# EAGLE board caldi (EAGLE 6.4)
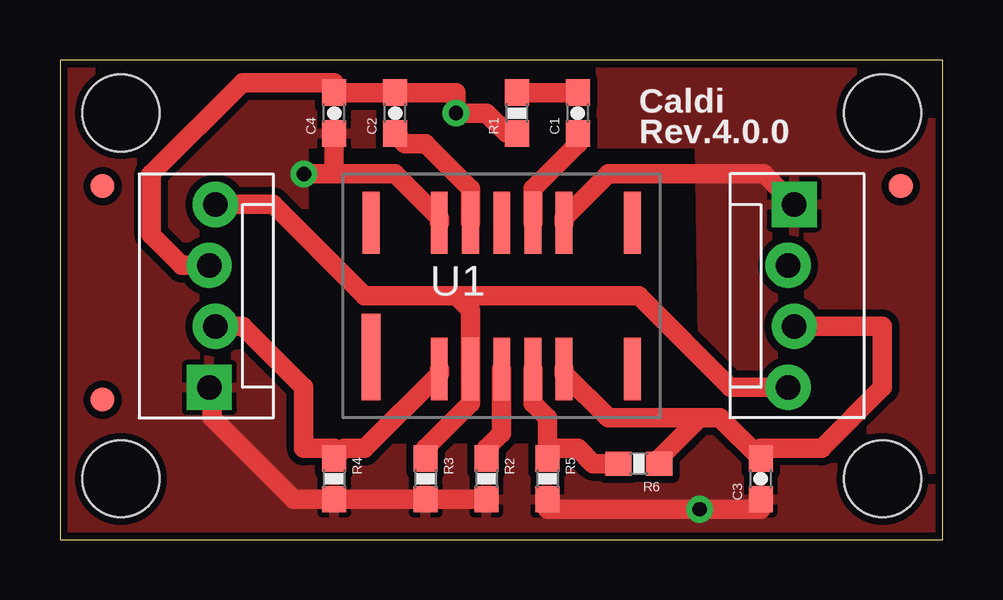
[diagram p0: board, top side]
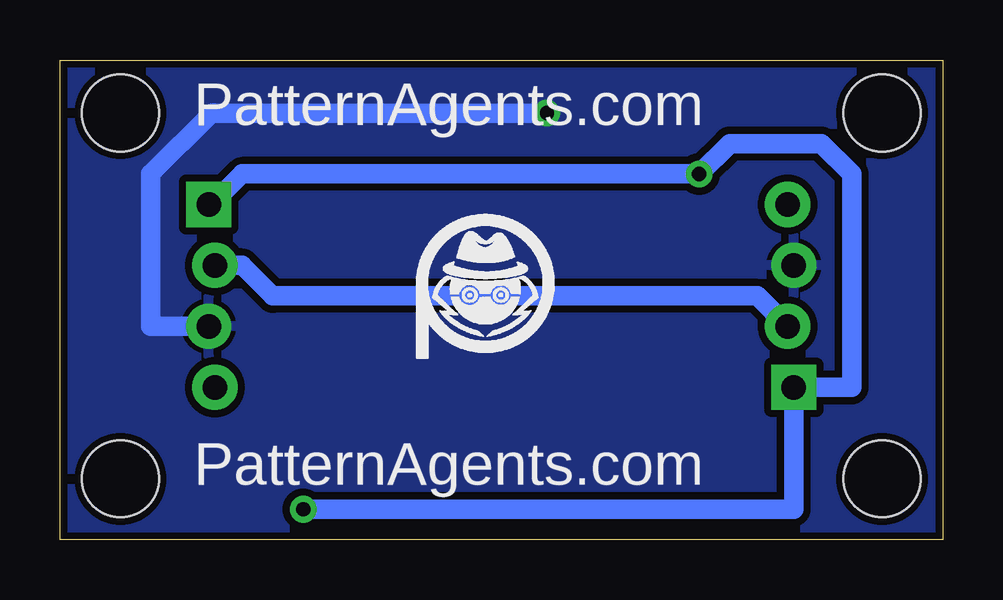
[diagram p1: board, bottom side, seen from below]

Size 36.81 x 19.99 mm. Coordinates in mm from the lower left corner, seen from the top.
Outline: 0,0 36.81,0 36.81,19.99 0,19.99 0,0
Copper layers (1*16): Top 0.035mm / dielectric 1.5mm / Bottom 0.035mm
Design rules "PatternAgents": minimum track width 8mil, minimum drill 14mil, track to track 8mil, track to pad 8mil, pad to pad 8mil, via to via 8mil, smd to smd 8mil, copper to edge 10mil, drill to drill 8mil, minimum pad ring 12mil, minimum via ring 10mil, stop-mask expansion 4mil, vias tented up to drill 25mil, thermal gap 8mil
Holes 3.2 mm at 2.54,2.54 2.54,17.78 34.29,17.78 34.29,2.54

## Footprints (pad centres in the part's own frame; a part is rotated, then mirrored left to right if it is on the bottom)
0603-CAP = smd 1.1 x 1: 1 -0.85,0; 2 0.85,0
MOLEX-1X4_LOCK = drill 1.016 pad 1.88 square: 1 0,0.127 | drill 1.016 pad 1.88: 2 2.54,-0.127; 3 5.08,0.127; 4 7.62,-0.127
FIDUCIAL-1X2 = smd 1 x 1: 1 0,0
0603-RES = smd 1.1 x 1: 1 -0.85,0; 2 0.85,0
AMG885X = smd 0.8 x 3.6: 1 -5.45,-2.55 | smd 0.7 x 2.6: 2 -2.6,-3.05; 3 -1.3,-3.05; 4 0,-3.05; 5 1.3,-3.05; 6 2.6,-3.05; 7 5.45,-3.05; 8 5.45,3.05; 9 2.6,3.05; 10 1.3,3.05; 11 0,3.05; 12 -1.3,3.05; 13 -2.6,3.05; 14 -5.45,3.05

## Placement (x,y rotation side)
C1  1uF  [0603-CAP]  21.59,17.78 90 top
C2  1.5uF  [0603-CAP]  13.97,17.78 90 top
C3  10uF  [0603-CAP]  29.21,2.54 90 top
C4  10uF  [0603-CAP]  11.43,17.78 90 top
JP1  [MOLEX-1X4_LOCK]  6.35,6.35 90 top
JP2  [MOLEX-1X4_LOCK]  30.48,13.97 270 top
JP3  FIDUCIAL1X2  [FIDUCIAL-1X2]  1.78,14.73 0 top
JP4  FIDUCIAL1X2  [FIDUCIAL-1X2]  1.78,5.84 0 top
JP5  FIDUCIAL1X2  [FIDUCIAL-1X2]  35.05,14.73 0 top
R1  20  [0603-RES]  19.05,17.78 90 top
R2  10K  [0603-RES]  17.78,2.54 270 top
R3  10K  [0603-RES]  15.24,2.54 270 top
R4  10K  [0603-RES]  11.43,2.54 270 top
R5  10K  [0603-RES]  20.32,2.54 270 top
R6  0  [0603-RES]  24.13,3.17 180 top
U1  AMG885X  [AMG885X]  18.41,10.16 0 top
U$4  PA_LOGO_SYMMED  [PA_LOGO_AGENT_MED_SYM]  19.05,10.16 0 bottom

## Library data of the parts
C1-C4 R1-R6 U1 = moxdes_V1_0
JP1 JP2 = SparkFun
JP3-JP5 = PatternAgents-Misc
U$4 = PatternAgents-Logos

## Nets
5V: C3.1 C4.1 JP1.1 JP2.1 R2.2 R3.2 R4.2 R5.2 U1.9 U1.13
!INT!: R2.1 U1.4
ADSEL: R5.1 R6.2 U1.5
GND: C2.2 C3.2 C4.2 JP1.3 JP2.3 R1.1 R6.1 U1.6
N$7: C1.1 U1.10
N$8: C1.2 R1.2
N$11: C2.1 U1.12
SCL: JP1.4 JP2.4 R3.1 U1.3
SDA: JP1.2 JP2.2 R4.1 U1.2

## Tracks (layer width: path | path; a pad name or v marks a point on that pad's centre or on a via)
5V  (via drill 0.6)
  Top 0.813: R2.2 R3.2 R4.2 9.74,1.69 6.35,5.08 6.35,6.22 JP1.1 | U1.13 15.81,13.39 13.97,15.24 11.43,15.24 | 11.43,15.24 C4.1 | v10.16,15.24 11.43,15.24 | U1.9 21.02,13.39 22.86,15.24 29.34,15.24 JP2.1 | C3.1 29.21,1.27 v26.67,1.27 20.32,1.27 R5.2
  Bottom 0.813: JP2.1 30.48,13.97 29.21,15.24 v10.16,15.24 8.89,16.51 5.08,16.51 3.81,15.24 3.81,6.35 JP1.1 6.22,1.27 v26.67,1.27
  pour Top (isolate 0.305, hatched): 0,20.32 36.83,20.32 36.83,0 26.92,0 26.67,16.51 10.16,16.51 10.16,3.81 26.42,3.81 26.42,0 0,0
  pour Top (isolate 0.305, hatched): 25.4,3.81 27.94,3.81 27.94,0 25.4,0
!INT!
  Top 0.813: U1.4 18.41,4.45 17.78,3.81 R2.1
ADSEL
  Top 0.813: U1.5 19.71,5.68 20.32,5.08 R5.1 20.74,3.81 21.59,3.81 22.23,3.17 R6.2
GND  (via drill 0.6)
  Top 0.813: JP1.3 5.08,11.43 3.81,12.7 3.81,15.24 7.62,19.05 11.43,19.05 C4.2 C2.2 16.51,18.63 v16.51,17.78 17.78,17.78 18.63,16.93 R1.1 | JP2.3 34.29,8.89 34.29,6.35 31.75,3.81 29.21,3.81 C3.2 27.52,5.08 26.67,5.08 | U1.6 21.02,6.92 22.86,5.08 26.67,5.08 | R6.1 24.98,3.39 26.67,5.08
  Bottom 0.813: v16.51,17.78 30.48,17.78 33.02,15.24 33.02,8.89 JP2.3
  pour Bottom (isolate 0.305, hatched): 0,20.32 36.83,20.32 36.83,0 0,0
N$7
  Top 0.813: U1.10 19.71,14.63 21.59,16.51 C1.1
N$8
  Top 0.813: R1.2 C1.2
N$11
  Top 0.813: U1.12 17.11,14.63 15.24,16.51 14.39,16.51 C2.1
SCL
  Top 0.813: R3.1 15.24,3.81 17.11,5.68 U1.3 17.11,9.55 16.51,10.16 | 16.51,10.16 12.7,10.16 8.89,13.97 JP1.4 | 16.51,10.16 24.13,10.16 27.94,6.35 JP2.4
SDA
  Top 0.813: U1.2 15.81,6.92 12.7,3.81 11.85,3.81 R4.1 11.43,3.81 10.16,3.81 10.16,6.35 7.62,8.89 JP1.2
  Bottom 0.813: JP2.2 29.21,11.43 27.94,10.16 7.75,10.16 JP1.2

## Text on the board
tPlace: Caldi | Rev.4.0.0
bPlace: PatternAgents.com | PatternAgents.com